# EAGLE board shield (EAGLE 8.7.1)
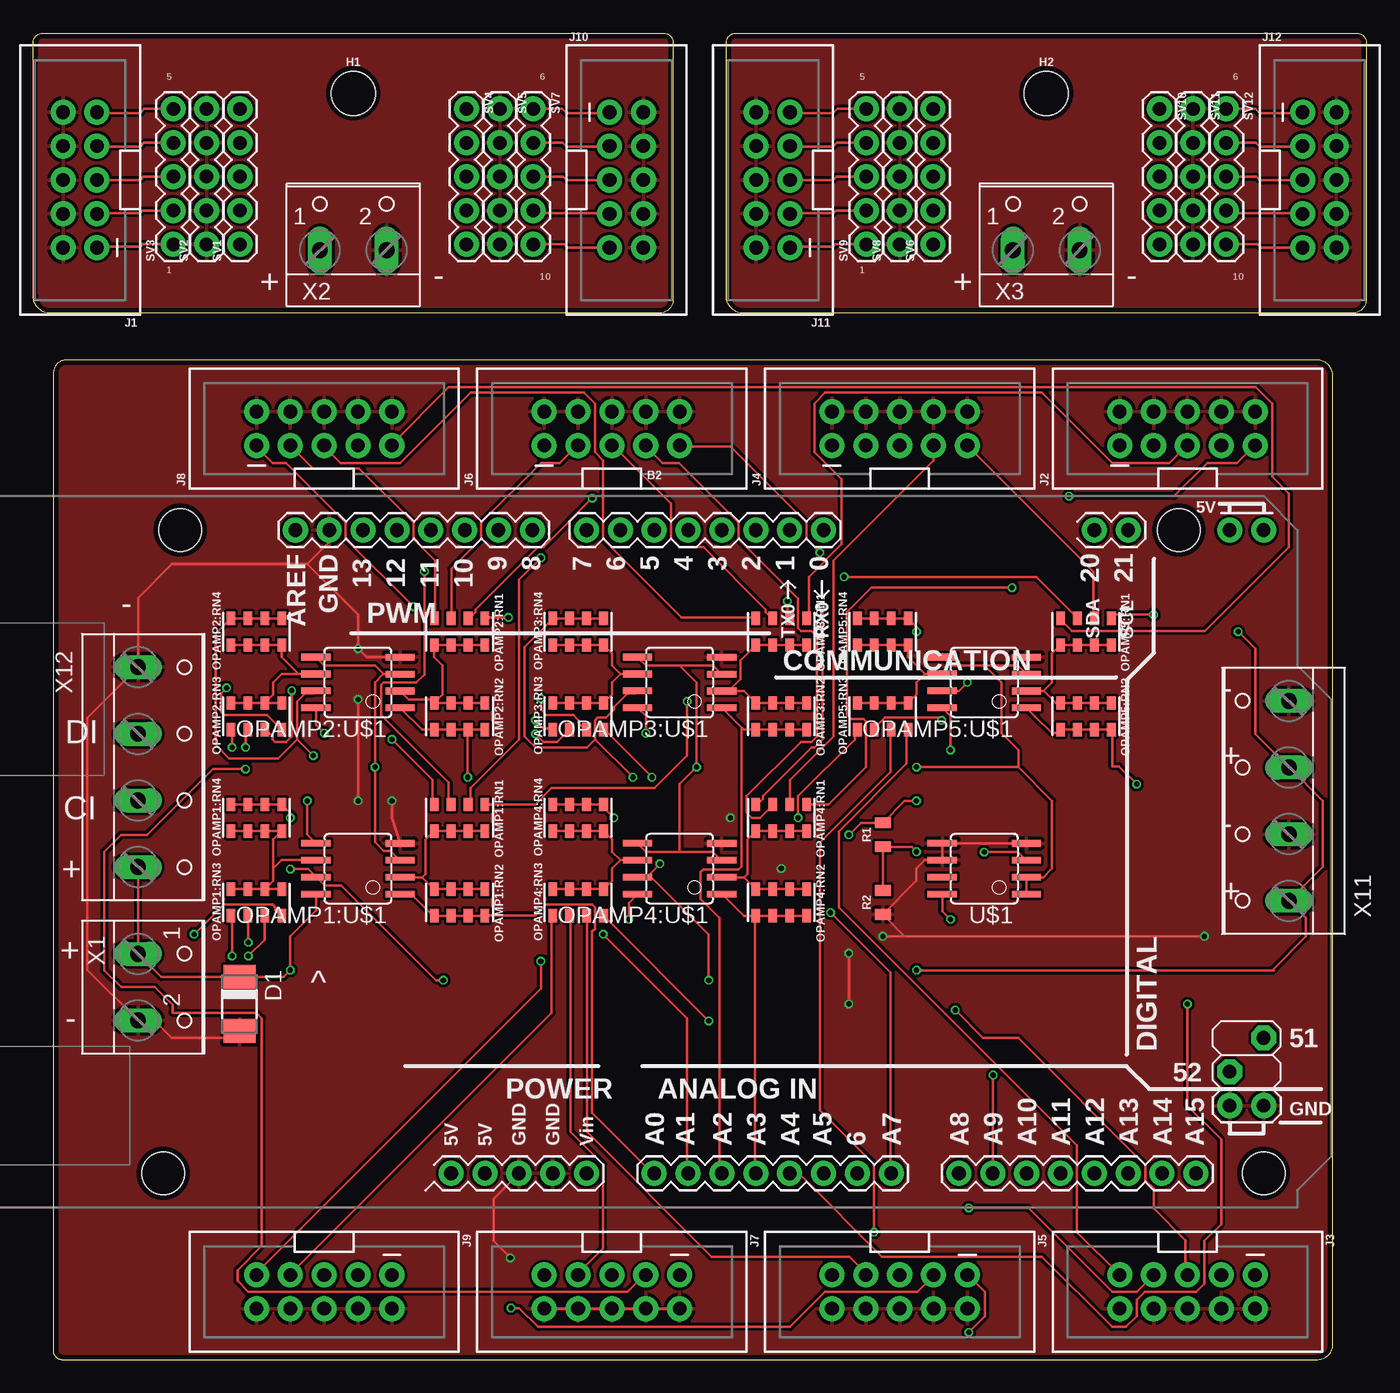
[diagram p0: board, top side]
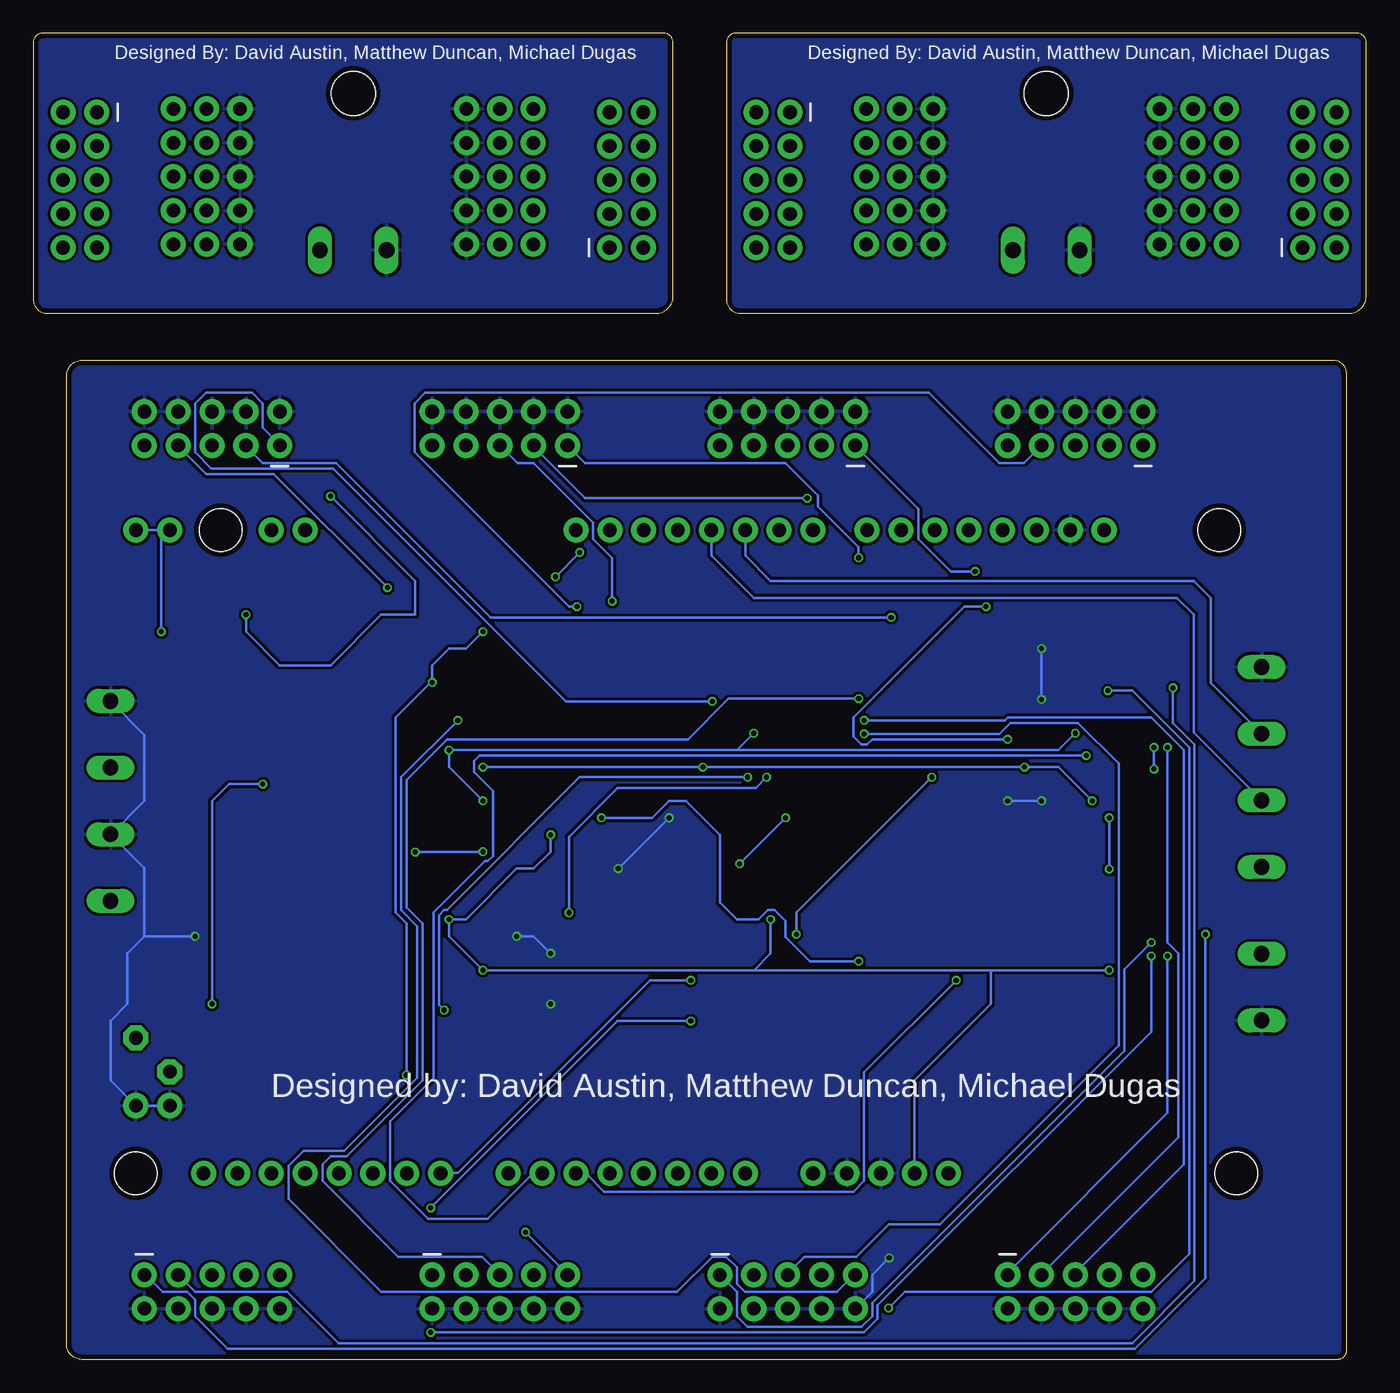
[diagram p1: board, bottom side, seen from below]

Size 100 x 99.5 mm. Coordinates in mm from the lower left corner, seen from the top.
Outline: 1.5,74 1.5,0.64 arc90 2.13,0 96.37,0 arc90 97.5,1.13 97.5,73.78 arc90 96.28,75 2.5,75 arc90 1.5,74
Outline: 0.68,99.5 47.32,99.5 arc-90 48,98.82 48,79.51 arc-90 46.99,78.5 1.27,78.5 arc-90 0,79.77 0,98.82 arc-90 0.68,99.5
Outline: 52.68,99.5 99.32,99.5 arc-90 100,98.82 100,79.51 arc-90 98.99,78.5 53.27,78.5 arc-90 52,79.77 52,98.82 arc-90 52.68,99.5
Copper layers (1*16): Top 0.035559375mm / dielectric 1.6mm / Bottom 0.035559375mm
Design rules "oshpark-2layer": minimum track width 6mil, minimum drill 10mil, track to track 6mil, track to pad 6mil, pad to pad 6mil, via to via 6mil, smd to smd 6mil, copper to edge 15mil, drill to drill 6mil, minimum pad ring 5mil, minimum via ring 5mil, stop-mask expansion 2.5mil, vias tented up to drill 0mil, thermal gap 10mil
Net classes: 0 default: width 0.203 mm, drill 0.381 mm, clearance 0.203 mm

## Footprints (pad centres in the part's own frame; a part is rotated, then mirrored left to right if it is on the bottom)
ARDUINO_MEGA_EDIT = drill 1.016 pad 1.88: 0 13.97,24.13; 1 11.43,24.13; 2 8.89,24.13; 3 6.35,24.13; 3.3V -13.97,-24.13; 4 3.81,24.13; 5 1.27,24.13; 5V@0 -11.43,-24.13; 5V@1 44.45,24.13; 5V@2 46.99,24.13; 6 -1.27,24.13; 7 -3.81,24.13; 8 -7.874,24.13; 9 -10.414,24.13; 10 -12.954,24.13; 11 -15.494,24.13; 12 -18.034,24.13; 13 -20.574,24.13; 20 34.29,24.13; 21 36.83,24.13; A0 1.27,-24.13; A1 3.81,-24.13; A2 6.35,-24.13; A3 8.89,-24.13; A4 11.43,-24.13; A5 13.97,-24.13; A6 16.51,-24.13; A7 19.05,-24.13; A8 24.13,-24.13; A9 26.67,-24.13; A10 29.21,-24.13; A11 31.75,-24.13; A12 34.29,-24.13; A13 36.83,-24.13; A14 39.37,-24.13; A15 41.91,-24.13; AREF -25.654,24.13; GND@0 -8.89,-24.13; GND@1 -6.35,-24.13; GND@2 44.45,-19.05; GND@3 46.99,-19.05; GND@4 -23.114,24.13; VIN -3.81,-24.13 | drill 1.016 pad 1.88 octagon: 51 46.99,-13.97; 52 44.45,-16.51 | hole 3.2: -34.29,24.13; -35.56,-24.13; 40.64,24.13; 46.99,-24.13
DO-214AC = smd 1.8 x 2.4: A 2.025,0; C -2.025,0
STAND-OFF = hole 3.302: 0,0
2X5-SHROUDED = drill 1.016 pad 1.88: 1 -1.27,5.08; 2 1.27,5.08; 3 -1.27,2.54; 4 1.27,2.54; 5 -1.27,0; 6 1.27,0; 7 -1.27,-2.54; 8 1.27,-2.54; 9 -1.27,-5.08; 10 1.27,-5.08
0805-ARV_EDIT10K = smd 0.65 x 1: 1 -1.905,-1; 2 -0.635,-1; 3 0.635,-1; 4 1.905,-1; 5 1.905,1; 6 0.635,1; 7 -0.635,1; 8 -1.905,1
SOIC8 = smd 0.5 x 2.2: 1 -1.905,-3.154; 2 -0.645,-3.154; 3 0.625,-3.154; 4 1.895,-3.154; 5 1.905,3.154; 6 0.635,3.154; 7 -0.635,3.154; 8 -1.905,3.154
0805 = smd 0.8 x 1.2: 1 -0.9,0; 2 0.9,0
1X05 = drill 1.016 pad 1.88: 1 0,0; 2 2.54,0; 3 5.08,0; 4 7.62,0; 5 10.16,0
W237-102 = drill 1.194 long: 1 -2.5,-1.27; 2 2.5,-1.27
W237-4 = drill 1.194 long: 1 -7.5,-1.27; 2 -2.5,-1.27; 3 2.5,-1.27; 4 7.5,-1.27

## Placement (x,y rotation side)
B2  ARDUINO_MEGA_R3_EDITARDUINO_MEGA_EDIT  [ARDUINO_MEGA_EDIT]  45.31,38.1 0 top
D1  [DO-214AC]  15.47,26.67 270 top
H1  STAND-OFF  [STAND-OFF]  24,95 0 top
H2  STAND-OFF  [STAND-OFF]  76,95 0 top
J1  AVR_SPI_PROG_5X2_NEWPTH2  [2X5-SHROUDED]  3.5,88.5 180 top
J2  AVR_SPI_PROG_5X2_NEWPTH2  [2X5-SHROUDED]  86.59,69.85 90 top
J3  AVR_SPI_PROG_5X2_NEWPTH2  [2X5-SHROUDED]  86.59,5.08 270 top
J4  AVR_SPI_PROG_5X2_NEWPTH2  [2X5-SHROUDED]  65,69.85 90 top
J5  AVR_SPI_PROG_5X2_NEWPTH2  [2X5-SHROUDED]  65,5.08 270 top
J6  AVR_SPI_PROG_5X2_NEWPTH2  [2X5-SHROUDED]  43.41,69.85 90 top
J7  AVR_SPI_PROG_5X2_NEWPTH2  [2X5-SHROUDED]  43.41,5.08 270 top
J8  AVR_SPI_PROG_5X2_NEWPTH2  [2X5-SHROUDED]  21.82,69.85 90 top
J9  AVR_SPI_PROG_5X2_NEWPTH2  [2X5-SHROUDED]  21.82,5.08 270 top
J10  AVR_SPI_PROG_5X2_NEWPTH2  [2X5-SHROUDED]  44.5,88.5 0 top
J11  AVR_SPI_PROG_5X2_NEWPTH2  [2X5-SHROUDED]  55.5,88.5 180 top
J12  AVR_SPI_PROG_5X2_NEWPTH2  [2X5-SHROUDED]  96.5,88.5 0 top
OPAMP1:RN1  10k  [0805-ARV_EDIT10K]  31.98,40.64 180 top
OPAMP1:RN2  10k  [0805-ARV_EDIT10K]  31.98,34.29 180 top
OPAMP1:RN3  10k  [0805-ARV_EDIT10K]  16.74,34.29 0 top
OPAMP1:RN4  10k  [0805-ARV_EDIT10K]  16.74,40.64 0 top
OPAMP1:U$1  MCP6002SMT  [SOIC8]  24.36,36.83 90 top
OPAMP2:RN1  10k  [0805-ARV_EDIT10K]  31.98,54.61 180 top
OPAMP2:RN2  10k  [0805-ARV_EDIT10K]  31.98,48.26 180 top
OPAMP2:RN3  10k  [0805-ARV_EDIT10K]  16.74,48.26 0 top
OPAMP2:RN4  10k  [0805-ARV_EDIT10K]  16.74,54.61 0 top
OPAMP2:U$1  MCP6002SMT  [SOIC8]  24.36,50.8 90 top
OPAMP3:RN1  10k  [0805-ARV_EDIT10K]  56.11,54.61 180 top
OPAMP3:RN2  10k  [0805-ARV_EDIT10K]  56.11,48.26 180 top
OPAMP3:RN3  10k  [0805-ARV_EDIT10K]  40.87,48.26 0 top
OPAMP3:RN4  10k  [0805-ARV_EDIT10K]  40.87,54.61 0 top
OPAMP3:U$1  MCP6002SMT  [SOIC8]  48.49,50.8 90 top
OPAMP4:RN1  10k  [0805-ARV_EDIT10K]  56.11,40.64 180 top
OPAMP4:RN2  10k  [0805-ARV_EDIT10K]  56.11,34.29 180 top
OPAMP4:RN3  10k  [0805-ARV_EDIT10K]  40.87,34.29 0 top
OPAMP4:RN4  10k  [0805-ARV_EDIT10K]  40.87,40.64 0 top
OPAMP4:U$1  MCP6002SMT  [SOIC8]  48.49,36.83 90 top
OPAMP5:RN1  10k  [0805-ARV_EDIT10K]  78.97,54.61 180 top
OPAMP5:RN2  10k  [0805-ARV_EDIT10K]  78.97,48.26 180 top
OPAMP5:RN3  10k  [0805-ARV_EDIT10K]  63.73,48.26 0 top
OPAMP5:RN4  10k  [0805-ARV_EDIT10K]  63.73,54.61 0 top
OPAMP5:U$1  MCP6002SMT  [SOIC8]  71.35,50.8 90 top
R1  1k  [0805]  63.73,39.37 90 top
R2  1k  [0805]  63.73,34.29 90 top
SV1  [1X05]  15.5,83.67 90 top
SV2  [1X05]  13,83.67 90 top
SV3  [1X05]  10.5,83.67 90 top
SV4  [1X05]  32.5,93.83 270 top
SV5  [1X05]  35,93.83 270 top
SV6  [1X05]  67.5,83.67 90 top
SV7  [1X05]  37.5,93.83 270 top
SV8  [1X05]  65,83.67 90 top
SV9  [1X05]  62.5,83.67 90 top
SV10  [1X05]  84.5,93.83 270 top
SV11  [1X05]  87,93.83 270 top
SV12  [1X05]  89.5,93.83 270 top
U$1  MCP6002SMT  [SOIC8]  71.35,36.83 90 top
X1  [W237-102]  9.12,27.94 270 top
X2  [W237-102]  24,84.5 0 top
X3  [W237-102]  76,84.5 0 top
X11  [W237-4]  92.94,41.91 90 top
X12  [W237-4]  9.12,44.45 270 top

## Library data of the parts
B2 = SparkFun-Boards
D1 = diode
H1 H2 = SparkFun-Hardware
J1-J12 = SparkFun-Connectors; PROD_ID: CONN-08671; SF_ID: PRT-08506
OPAMP1:RN1-OPAMP1:RN4 OPAMP2:RN1-OPAMP2:RN4 OPAMP3:RN1-OPAMP3:RN4 OPAMP4:RN1-OPAMP4:RN4 OPAMP5:RN1-OPAMP5:RN4 R1 R2 = SparkFun-Resistors
OPAMP1:U$1 OPAMP2:U$1 OPAMP3:U$1 OPAMP4:U$1 OPAMP5:U$1 U$1 = adam - ics
SV1-SV12 = SparkFun-Connectors
X1 = con-wago-500; MPN: 237-102; OC_FARNELL: unknown; OC_NEWARK: 70K9898
X2 X3 = ECE388; MPN: 237-102; OC_FARNELL: unknown; OC_NEWARK: 70K9898
X11 X12 = con-wago-500; OC_FARNELL: unknown; OC_NEWARK: unknown

## Nets
+5V: B2.5V@0 B2.5V@1 B2.5V@2 D1.C OPAMP1:U$1.8 OPAMP2:U$1.8 OPAMP3:U$1.8 OPAMP4:U$1.8 OPAMP5:U$1.8 R1.2 U$1.8 X1.1 X11.1 X11.3 X12.4
A1O: B2.A0 OPAMP1:RN2.5 OPAMP1:RN2.6 OPAMP1:RN2.7 OPAMP1:RN2.8 OPAMP1:U$1.1
A2O: B2.A1 OPAMP2:RN2.5 OPAMP2:RN2.6 OPAMP2:RN2.7 OPAMP2:RN2.8 OPAMP2:U$1.1
A3O: B2.A2 OPAMP3:RN2.5 OPAMP3:RN2.6 OPAMP3:RN2.7 OPAMP3:RN2.8 OPAMP3:U$1.1
A4O: B2.A3 OPAMP4:RN2.5 OPAMP4:RN2.6 OPAMP4:RN2.7 OPAMP4:RN2.8 OPAMP4:U$1.1
A5O: B2.A4 OPAMP5:RN2.5 OPAMP5:RN2.6 OPAMP5:RN2.7 OPAMP5:RN2.8 OPAMP5:U$1.1
A6O: B2.A5 OPAMP1:RN4.5 OPAMP1:RN4.6 OPAMP1:RN4.7 OPAMP1:RN4.8 OPAMP1:U$1.7
A7O: B2.A6 OPAMP2:RN4.5 OPAMP2:RN4.6 OPAMP2:RN4.7 OPAMP2:RN4.8 OPAMP2:U$1.7
A8O: B2.A7 OPAMP3:RN4.5 OPAMP3:RN4.6 OPAMP3:RN4.7 OPAMP3:RN4.8 OPAMP3:U$1.7
A9O: B2.A8 OPAMP4:RN4.5 OPAMP4:RN4.6 OPAMP4:RN4.7 OPAMP4:RN4.8 OPAMP4:U$1.7
A10O: B2.A9 OPAMP5:RN4.5 OPAMP5:RN4.6 OPAMP5:RN4.7 OPAMP5:RN4.8 OPAMP5:U$1.7
CI: B2.4 X12.3
DI: B2.5 X12.2
GND: B2.GND@0 B2.GND@1 B2.GND@2 B2.GND@3 B2.GND@4 D1.A J2.2 J2.4 J2.6 J2.8 J2.10 J3.2 J3.4 J3.6 J3.8 J3.10 J4.2 J4.4 J4.6 J4.8 J4.10 J5.2 J5.4 J5.6 J5.8 J5.10 J6.2 J6.4 J6.6 J6.8 J6.10 J7.2 J7.4 J7.6 J7.8 J7.10 J8.2 J8.4 J8.6 J8.8 J8.10 J9.2 J9.4 J9.6 J9.8 J9.10 OPAMP1:U$1.4 OPAMP2:U$1.4 OPAMP3:U$1.4 OPAMP4:U$1.4 OPAMP5:U$1.4 R2.1 U$1.4 U$1.5 U$1.6 X1.2 X11.2 X11.4 X12.1
GND1: J1.2 J1.4 J1.6 J1.8 J1.10 J10.2 J10.4 J10.6 J10.8 J10.10 SV2.1 SV2.2 SV2.3 SV2.4 SV2.5 SV5.1 SV5.2 SV5.3 SV5.4 SV5.5 X2.2
GND2: J11.2 J11.4 J11.6 J11.8 J11.10 J12.2 J12.4 J12.6 J12.8 J12.10 SV8.1 SV8.2 SV8.3 SV8.4 SV8.5 SV11.1 SV11.2 SV11.3 SV11.4 SV11.5 X3.2
N$1: U$1.7
N$2: R1.1 R2.2 U$1.3
OPAMP1:N$1: OPAMP1:RN3.5 OPAMP1:RN3.6 OPAMP1:RN3.7 OPAMP1:RN3.8 OPAMP1:RN4.1 OPAMP1:RN4.2 OPAMP1:RN4.3 OPAMP1:RN4.4 OPAMP1:U$1.6
OPAMP1:N$2: OPAMP1:RN1.5 OPAMP1:RN1.6 OPAMP1:RN1.7 OPAMP1:RN1.8 OPAMP1:RN2.1 OPAMP1:RN2.2 OPAMP1:RN2.3 OPAMP1:RN2.4 OPAMP1:U$1.2
OPAMP2:N$1: OPAMP2:RN3.5 OPAMP2:RN3.6 OPAMP2:RN3.7 OPAMP2:RN3.8 OPAMP2:RN4.1 OPAMP2:RN4.2 OPAMP2:RN4.3 OPAMP2:RN4.4 OPAMP2:U$1.6
OPAMP2:N$2: OPAMP2:RN1.5 OPAMP2:RN1.6 OPAMP2:RN1.7 OPAMP2:RN1.8 OPAMP2:RN2.1 OPAMP2:RN2.2 OPAMP2:RN2.3 OPAMP2:RN2.4 OPAMP2:U$1.2
OPAMP3:N$1: OPAMP3:RN3.5 OPAMP3:RN3.6 OPAMP3:RN3.7 OPAMP3:RN3.8 OPAMP3:RN4.1 OPAMP3:RN4.2 OPAMP3:RN4.3 OPAMP3:RN4.4 OPAMP3:U$1.6
OPAMP3:N$2: OPAMP3:RN1.5 OPAMP3:RN1.6 OPAMP3:RN1.7 OPAMP3:RN1.8 OPAMP3:RN2.1 OPAMP3:RN2.2 OPAMP3:RN2.3 OPAMP3:RN2.4 OPAMP3:U$1.2
OPAMP4:N$1: OPAMP4:RN3.5 OPAMP4:RN3.6 OPAMP4:RN3.7 OPAMP4:RN3.8 OPAMP4:RN4.1 OPAMP4:RN4.2 OPAMP4:RN4.3 OPAMP4:RN4.4 OPAMP4:U$1.6
OPAMP4:N$2: OPAMP4:RN1.5 OPAMP4:RN1.6 OPAMP4:RN1.7 OPAMP4:RN1.8 OPAMP4:RN2.1 OPAMP4:RN2.2 OPAMP4:RN2.3 OPAMP4:RN2.4 OPAMP4:U$1.2
OPAMP5:N$1: OPAMP5:RN3.5 OPAMP5:RN3.6 OPAMP5:RN3.7 OPAMP5:RN3.8 OPAMP5:RN4.1 OPAMP5:RN4.2 OPAMP5:RN4.3 OPAMP5:RN4.4 OPAMP5:U$1.6
OPAMP5:N$2: OPAMP5:RN1.5 OPAMP5:RN1.6 OPAMP5:RN1.7 OPAMP5:RN1.8 OPAMP5:RN2.1 OPAMP5:RN2.2 OPAMP5:RN2.3 OPAMP5:RN2.4 OPAMP5:U$1.2
S1: J1.1 SV3.1
S1A: J2.1 OPAMP1:RN1.1
S1B: J3.1 OPAMP1:RN3.4
S2: J1.3 SV3.2
S2A: J2.3 OPAMP2:RN1.1
S2B: J3.3 OPAMP2:RN3.4
S3: J1.5 SV3.3
S3A: J2.5 OPAMP3:RN1.1
S3B: J3.5 OPAMP3:RN3.4
S4: J1.7 SV3.4
S4A: J2.7 OPAMP4:RN1.1
S4B: J3.7 OPAMP4:RN3.4
S5: J1.9 SV3.5
S5A: J2.9 OPAMP5:RN1.1
S5B: J3.9 OPAMP5:RN3.4
S6: J10.1 SV7.1
S6A: J4.1 OPAMP1:RN1.2
S6B: J5.1 OPAMP1:RN3.3
S7: J10.3 SV7.2
S7A: J4.3 OPAMP2:RN1.2
S7B: J5.3 OPAMP2:RN3.3
S8: J10.5 SV7.3
S8A: J4.5 OPAMP3:RN1.2
S8B: J5.5 OPAMP3:RN3.3
S9: J10.7 SV7.4
S9A: J4.7 OPAMP4:RN1.2
S9B: J5.7 OPAMP4:RN3.3
S10: J10.9 SV7.5
S10A: J4.9 OPAMP5:RN1.2
S10B: J5.9 OPAMP5:RN3.3
S11: J11.1 SV9.1
S11A: J6.1 OPAMP1:RN1.3
S11B: J7.1 OPAMP1:RN3.2
S12: J11.3 SV9.2
S12A: J6.3 OPAMP2:RN1.3
S12B: J7.3 OPAMP2:RN3.2
S13: J11.5 SV9.3
S13A: J6.5 OPAMP3:RN1.3
S13B: J7.5 OPAMP3:RN3.2
S14: J11.7 SV9.4
S14A: J6.7 OPAMP4:RN1.3
S14B: J7.7 OPAMP4:RN3.2
S15: J11.9 SV9.5
S15A: J6.9 OPAMP5:RN1.3
S15B: J7.9 OPAMP5:RN3.2
S16: J12.1 SV12.1
S16A: J8.1 OPAMP1:RN1.4
S16B: J9.1 OPAMP1:RN3.1
S17: J12.3 SV12.2
S17A: J8.3 OPAMP2:RN1.4
S17B: J9.3 OPAMP2:RN3.1
S18: J12.5 SV12.3
S18A: J8.5 OPAMP3:RN1.4
S18B: J9.5 OPAMP3:RN3.1
S19: J12.7 SV12.4
S19A: J8.7 OPAMP4:RN1.4
S19B: J9.7 OPAMP4:RN3.1
S20: J12.9 SV12.5
S20A: J8.9 OPAMP5:RN1.4
S20B: J9.9 OPAMP5:RN3.1
VCC: SV1.1 SV1.2 SV1.3 SV1.4 SV1.5 SV4.1 SV4.2 SV4.3 SV4.4 SV4.5 X2.1
VCC1: SV6.1 SV6.2 SV6.3 SV6.4 SV6.5 SV10.1 SV10.2 SV10.3 SV10.4 SV10.5 X3.1
VREF: OPAMP1:U$1.3 OPAMP1:U$1.5 OPAMP2:U$1.3 OPAMP2:U$1.5 OPAMP3:U$1.3 OPAMP3:U$1.5 OPAMP4:U$1.3 OPAMP4:U$1.5 OPAMP5:U$1.3 OPAMP5:U$1.5 U$1.1 U$1.2

## Tracks (layer width: path | path; a pad name or v marks a point on that pad's centre or on a via)
+5V  (via drill 0.38)
  Top 0.203: X12.4 X1.1 9.59,28.7 D1.C 18.77,28.7 v19.28,29.21 19.28,31.75 21.21,33.68 OPAMP1:U$1.8 | v68.81,33.02 68.2,33.63 U$1.8 | v61.19,39.37 62.09,40.27 R1.2 65.37,41.91 v66.27,41.91 | OPAMP2:U$1.8 21.21,47.6 v21.82,46.99 | v68.81,45.72 68.81,48.28 OPAMP5:U$1.8 | OPAMP3:U$1.8 45.95,48.28 v45.95,46.99 | v44.68,33.02 44.68,34.27 OPAMP4:U$1.8 | v66.27,29.21 92.94,29.21 | 92.94,29.21 93.06,29.21 | 92.94,29.21 95.48,31.75 95.48,33.14 X11.1 96.75,36.95 96.75,41.91 94.25,44.41 X11.3 91.67,46.95 91.67,53.34 v90.4,54.61
  Bottom 0.203: v19.28,29.21 28.17,29.21 | 28.17,29.21 45.95,29.21 | 45.95,29.21 v66.27,29.21 68.81,31.75 v68.81,33.02 67.54,33.02 63.73,36.83 62.46,36.83 61.19,38.1 v61.19,39.37 | v66.27,41.91 68.81,44.45 v68.81,45.72 47.22,45.72 | 47.22,45.72 23.09,45.72 v21.82,46.99 | v45.95,46.99 47.22,45.72 | 45.95,29.21 44.68,30.48 v44.68,33.02 | B2.5V@0 33.89,20.95 28.17,26.67 28.17,29.21 | v90.4,54.61 90.4,61.59 B2.5V@1 B2.5V@2
A1O
  Top 0.203: B2.A0 46.41,14.02 41.94,18.49 41.94,32.11 42.14,32.31 42.14,33.93 41.94,34.14 38.48,34.14 37.67,33.33 34.01,33.33 OPAMP1:RN2.8 OPAMP1:RN2.7 OPAMP1:RN2.6 OPAMP1:RN2.5 29.95,33.33 28.35,34.92 OPAMP1:U$1.1
A2O  (via drill 0.38)
  Top 0.203: OPAMP2:RN2.7 OPAMP2:RN2.6 OPAMP2:RN2.5 29.17,47.26 27.54,48.9 OPAMP2:U$1.1 | OPAMP2:RN2.7 OPAMP2:RN2.8 | v42.75,31.9 49.05,25.6 49.05,14.02 B2.A1 | v32.59,43.69 32.59,47.14 OPAMP2:RN2.7
  Bottom 0.203: v42.75,31.9 42.75,33.53 v32.59,43.69
A3O
  Top 0.203: OPAMP3:RN2.8 OPAMP3:RN2.7 OPAMP3:RN2.6 OPAMP3:RN2.5 53.3,47.26 53.16,47.4 | OPAMP3:U$1.1 51.66,48.9 53.16,47.4 | B2.A2 51.49,14.02 51.49,33.12 50.06,34.54 50.06,36.58 50.27,36.78 52.91,36.78 53.11,36.98 53.11,47.35 53.16,47.4
A4O
  Top 0.203: OPAMP4:RN2.8 OPAMP4:RN2.7 OPAMP4:RN2.6 OPAMP4:RN2.5 | OPAMP4:RN2.5 53.3,33.29 51.66,34.92 OPAMP4:U$1.1 | B2.A3 54.13,14.02 54.13,33.12 OPAMP4:RN2.5
A5O  (via drill 0.38)
  Top 0.203: OPAMP5:U$1.1 75.14,48.26 75.16,48.26 76.43,46.99 76.8,46.99 OPAMP5:RN2.5 OPAMP5:RN2.6 OPAMP5:RN2.7 OPAMP5:RN2.8 80.95,47.14 80.95,44.5 81.46,44.5 v82.78,43.18 | B2.A4 56.77,13.82 57.58,13.82 63.68,7.72 75.67,7.72 80.95,2.44 81.97,2.44 82.78,3.25 82.78,4.47 83.39,5.08 87.25,5.08 87.86,5.69 87.86,8.89 89.13,10.16 89.13,16.51 86.59,19.05 v86.59,26.67
  Bottom 0.203: v86.59,26.67 86.59,41.91 85.32,43.18 v82.78,43.18
A6O  (via drill 0.38)
  Top 0.203: OPAMP1:RN4.8 OPAMP1:RN4.7 OPAMP1:RN4.6 OPAMP1:RN4.5 19.28,41.01 v19.28,40.64 | v30.76,28.45 30.2,28.45 23.09,35.56 21.84,35.56 OPAMP1:U$1.7 20.61,36.79 v19.28,36.79
  Bottom 0.203: v30.76,28.45 37.67,21.54 37.67,13.41 38.48,12.6 57.18,12.6 58.4,13.82 59.21,13.82 B2.A5 | v19.28,36.79 v19.28,40.64
A7O  (via drill 0.38)
  Top 0.203: OPAMP2:RN4.5 OPAMP2:RN4.6 OPAMP2:RN4.7 OPAMP2:RN4.8 14.71,55.47 13.69,54.46 13.69,46.13 14.71,45.11 18.37,45.11 19.79,46.53 | 19.79,46.53 19.79,49.38 20.4,49.99 21.01,49.99 OPAMP2:U$1.7 | 19.79,46.53 v21.01,45.31
  Bottom 0.203: v21.01,45.31 66.52,45.31 66.93,44.91 66.93,44.09 65.51,42.67 65.51,37.8 65.91,37.39 66.12,37.39 69.98,33.53 69.98,21.13 73.23,17.88 73.23,13.41 70.39,10.57 65.91,10.57 62.66,13.82 61.85,13.82 B2.A6
A8O  (via drill 0.38)
  Top 0.203: OPAMP3:RN4.5 OPAMP3:RN4.6 OPAMP3:RN4.7 OPAMP3:RN4.8 38.89,55.47 36.86,53.44 36.86,46.74 37.67,45.92 41.53,45.92 42.14,46.53 | 42.14,46.53 42.14,47.95 42.34,48.16 42.95,48.16 43.56,48.77 43.56,48.97 44.58,49.99 45.19,49.99 OPAMP3:U$1.7 | v59.82,33.53 64.29,29.06 64.29,14.02 B2.A7 | 42.14,46.53 v44.98,43.69
  Bottom 0.203: v59.82,33.53 59.82,39.22 56.16,42.88 45.8,42.88 v44.98,43.69
A9O  (via drill 0.38)
  Top 0.203: OPAMP4:RN4.8 OPAMP4:RN4.7 OPAMP4:RN4.6 OPAMP4:RN4.5 42.75,41.45 v43.56,40.64 | 46.2,36.37 45.39,36.37 OPAMP4:U$1.7 46.2,36.37 | v47.02,37.19 46.2,36.37 | v50.67,28.45 50.67,31.9 46.2,36.37
  Bottom 0.203: v43.56,40.64 v47.02,37.19 | v50.67,28.45 53.72,28.45 68.15,14.02 69.37,14.02 B2.A8
A10O  (via drill 0.38)
  Top 0.203: OPAMP5:RN4.8 OPAMP5:RN4.7 OPAMP5:RN4.6 OPAMP5:RN4.5 66.27,54.98 v66.27,54.61 | v70.08,50.8 69.44,50.16 OPAMP5:U$1.7 | v72.01,21.34 72.01,14.02 B2.A9
  Bottom 0.203: v66.27,54.61 67.54,53.34 68.81,53.34 70.08,52.07 v70.08,50.8 70.18,50.8 72.82,48.16 72.82,33.53 72.01,32.72 v72.01,21.34
CI
  Bottom 0.203: X12.3 12.93,47.03 12.93,55.88 14.2,57.15 45.95,57.15 49.12,60.33 B2.4
DI
  Bottom 0.203: X12.2 11.66,50.76 11.66,57.15 12.93,58.42 44.68,58.42 46.59,60.33 B2.5
GND  (via drill 0.38)
  Top 0.203: D1.A 14.96,24.13 10.39,24.13 9.08,25.44 X1.2 4.04,29.25 4.04,48.14 X12.1 7.85,57.15 10.39,59.69 20.55,59.69 | B2.GND@4 22.2,61.34 20.55,59.69 | U$1.4 U$1.5 U$1.6 66.91,37.47 66.27,36.83 66.27,35.93 R2.1 65.37,31.75 | B2.GND@0 34.52,12.06 34.52,8.89 v35.79,7.62 | J7.2 J7.4 J7.6 J7.8 J7.10 | v61.19,26.67 v61.19,30.48 | v63.73,31.75 65.37,31.75 | OPAMP2:U$1.4 25,52.7 v24.36,53.34 24.36,55.88 20.55,59.69 | v24.36,49.53 v24.36,41.91 | v26.9,41.91 26.9,40.61 OPAMP1:U$1.4 | 65.37,31.75 v87.86,31.75
  Bottom 0.203: B2.GND@3 B2.GND@2 | B2.GND@3 91.67,19.68 | v35.79,7.62 37.06,6.35 37.06,5.08 J7.10 | v61.19,30.48 62.46,31.75 v63.73,31.75 | v24.36,53.34 v24.36,49.53 | v24.36,41.91 v26.9,41.91 | v56.11,36.83 v52.3,40.64 | B2.GND@3 94.21,20.95 94.21,25.4 92.94,26.67 92.94,30.48 91.67,31.75 | v87.86,31.75 91.67,31.75 | 91.67,31.75 91.67,36.87 X11.2 94.17,39.41 91.67,41.91 91.67,46.87 X11.4
  pour Top: 1.5,0.5 1.5,74 arc-90 2.5,75 96.5,75 arc-90 97.5,74 97.5,1 arc-90 96.5,0 2,0 arc-90
  pour Bottom: 1.5,74 arc-90 2.5,75 96.5,75 arc-90 97.5,74 97.5,1 arc-90 96.5,0 2,0 arc-90 1.5,0.5
GND1
  pour Top: 0,99.5 48,99.5 48.26,78.5 0,78.5
GND2
  pour Top: 52,99.5 100,99.5 100.26,78.5 52,78.5
N$2  (via drill 0.38)
  Top 0.203: v66.27,38.1 65.9,38.47 R1.1 R2.2 | v71.35,38.08 73.88,38.08 U$1.3
  Bottom 0.203: v66.27,38.1 71.35,38.1 v71.35,38.08
OPAMP1:N$1
  Top 0.203: OPAMP1:RN4.1 OPAMP1:RN4.2 OPAMP1:RN4.3 OPAMP1:RN4.4 18.01,39.01 18.01,36.83 | OPAMP1:RN3.8 OPAMP1:RN3.7 OPAMP1:RN3.6 | OPAMP1:RN3.6 OPAMP1:RN3.5 | OPAMP1:RN3.6 18.01,35.92 18.01,36.83 | 18.01,36.83 18.64,37.47 OPAMP1:U$1.6
OPAMP1:N$2
  Top 0.203: OPAMP1:RN2.1 OPAMP1:RN2.2 OPAMP1:RN2.3 OPAMP1:RN2.4 29.18,36.19 | OPAMP1:RN1.8 OPAMP1:RN1.7 OPAMP1:RN1.6 OPAMP1:RN1.5 29.44,39.01 29.44,36.45 29.18,36.19 | OPAMP1:U$1.2 29.18,36.19
OPAMP2:N$1
  Top 0.203: OPAMP2:RN3.5 OPAMP2:RN3.6 | OPAMP2:RN3.6 OPAMP2:RN3.7 OPAMP2:RN3.8 | OPAMP2:RN4.1 OPAMP2:RN4.2 OPAMP2:RN4.3 OPAMP2:RN4.4 18.64,52.7 19.91,51.44 | OPAMP2:U$1.6 19.91,51.44 | OPAMP2:RN3.6 18.01,49.9 18.01,50.8 18.64,51.44 19.91,51.44
OPAMP2:N$2
  Top 0.203: OPAMP2:RN2.1 OPAMP2:RN2.2 OPAMP2:RN2.3 OPAMP2:RN2.4 | OPAMP2:RN2.4 29.8,49.53 28.14,49.53 OPAMP2:U$1.2 | OPAMP2:RN2.4 30.71,49.9 30.71,52.07 30.07,52.7 OPAMP2:RN1.5 OPAMP2:RN1.6 OPAMP2:RN1.7 OPAMP2:RN1.8
OPAMP3:N$1
  Top 0.203: OPAMP3:RN3.8 OPAMP3:RN3.7 OPAMP3:RN3.6 OPAMP3:RN3.5 43.41,49.9 43.41,50.8 44.05,51.44 | OPAMP3:RN4.1 OPAMP3:RN4.2 OPAMP3:RN4.3 OPAMP3:RN4.4 43.41,52.98 43.41,52.07 44.05,51.44 | 44.05,51.44 OPAMP3:U$1.6
OPAMP3:N$2
  Top 0.203: OPAMP3:RN1.8 OPAMP3:RN1.7 OPAMP3:RN1.6 OPAMP3:RN1.5 53.05,52.45 53.05,51.05 52.3,50.3 52.3,50.16 | OPAMP3:RN2.1 OPAMP3:RN2.2 OPAMP3:RN2.3 OPAMP3:RN2.4 53.31,50.16 52.3,50.16 | 52.3,50.16 OPAMP3:U$1.2
OPAMP4:N$1
  Top 0.203: OPAMP4:RN3.8 OPAMP4:RN3.7 OPAMP4:RN3.6 OPAMP4:RN3.5 43.41,35.92 43.41,36.83 44.05,37.47 | 44.05,37.47 OPAMP4:U$1.6 | OPAMP4:RN4.1 OPAMP4:RN4.2 OPAMP4:RN4.3 OPAMP4:RN4.4 43.41,39.01 43.41,38.1 44.05,37.47
OPAMP4:N$2
  Top 0.203: OPAMP4:RN2.1 OPAMP4:RN2.2 OPAMP4:RN2.3 OPAMP4:RN2.4 53.31,36.19 | 53.31,36.19 OPAMP4:U$1.2 | OPAMP4:RN1.8 OPAMP4:RN1.7 OPAMP4:RN1.6 OPAMP4:RN1.5 53.57,39.01 53.57,36.45 53.31,36.19
OPAMP5:N$1
  Top 0.203: OPAMP5:RN4.1 OPAMP5:RN4.2 OPAMP5:RN4.3 OPAMP5:RN4.4 65.63,52.7 66.91,51.44 | OPAMP5:RN3.8 OPAMP5:RN3.7 OPAMP5:RN3.6 OPAMP5:RN3.5 66.27,49.9 66.27,50.8 66.91,51.44 | 66.91,51.44 OPAMP5:U$1.6
OPAMP5:N$2
  Top 0.203: OPAMP5:RN2.1 OPAMP5:RN2.2 OPAMP5:RN2.3 OPAMP5:RN2.4 76.7,49.26 75.81,50.16 75.78,50.16 | 75.78,50.16 OPAMP5:U$1.2 | OPAMP5:RN1.8 OPAMP5:RN1.7 OPAMP5:RN1.6 OPAMP5:RN1.5 76.43,52.98 76.43,50.8 75.78,50.16
S1
  Top 0.203: J1.1 4.85,83.5 8,83.5 8.17,83.67 SV3.1
S1A  (via drill 0.38)
  Top 0.203: v49.05,49.38 49.05,45.31 46.61,42.88 38.89,42.88 37.67,41.66 34.01,41.66 OPAMP1:RN1.1
  Bottom 0.203: v49.05,49.38 60.02,49.38 77.5,66.85 86.64,66.85 87.86,68.07 87.86,71.73 87.05,72.54 83.59,72.54 82.78,71.73 82.78,69.9 81.56,68.68 J2.1
S1B  (via drill 0.38)
  Top 0.203: v12.07,31.9 14.3,34.14 17.96,34.14 18.16,33.93 18.16,33.73 18.57,33.33 OPAMP1:RN3.4
  Bottom 0.203: v12.07,31.9 12.07,6.1 17.35,0.81 85.42,0.81 87.86,3.25 87.86,4.47 88.47,5.08 90.3,5.08 91.52,6.3 J3.1
S2
  Top 0.203: J1.3 4.85,86.04 4.89,86 8,86 8.21,86.21 SV3.2
S2A  (via drill 0.38)
  Top 0.203: v35.64,55.68 34.01,55.68 OPAMP2:RN1.1
  Bottom 0.203: v35.64,55.68 65.71,55.68 77.29,67.26 82.78,67.26 84,68.48 J2.3
S2B  (via drill 0.38)
  Top 0.203: v14.51,50.39 14.1,49.99 14.1,48.56 14.3,48.36 17.55,48.36 18.57,47.35 OPAMP2:RN3.4
  Bottom 0.203: v14.51,50.39 14.51,47.75 12.88,46.13 12.88,5.89 17.55,1.22 77.09,1.22 80.95,5.08 87.86,5.08 J3.3
S3
  Top 0.203: 4.85,88.58 J1.5 8,88.5 8.25,88.75 SV3.3
S3A
  Top 0.203: OPAMP3:RN1.1 58.19,55.68 58.19,58.73 60.63,61.16 60.63,66.04 58.6,68.07 58.6,71.73 59.41,72.54 75.67,72.54 80.95,67.26 85.22,67.26 86.44,68.48 J2.5
S3B  (via drill 0.38)
  Top 0.203: v46.41,43.69 42.95,47.14 OPAMP3:RN3.4 | J3.5 86.44,6.5 86.44,8.94 84.05,11.33 84.05,12.85 83.44,13.45 83.44,14.58 73.89,24.13 71.25,24.13 v69.17,26.21
  Bottom 0.203: v46.41,43.69 59.01,43.69 68.96,33.73 69.17,33.73 69.57,33.33 69.57,26.62 v69.17,26.21
S4
  Top 0.203: J1.7 4.85,91.12 4.97,91 8,91 8.29,91.29 SV3.4
S4A  (via drill 0.38)
  Top 0.203: v73.43,57.91 62.87,57.91 61.04,56.08 61.04,48.41 61.38,48.06 62.28,48.06 62.46,47.88 62.46,44.45 59.65,41.64 OPAMP4:RN1.1 58.19,41.66
  Bottom 0.203: v73.43,57.91 81.97,66.45 87.05,66.45 89.08,68.48 J2.7
S4B  (via drill 0.38)
  Top 0.203: v50.67,25.4 42.95,33.12 OPAMP4:RN3.4 | v70.18,11.38 74.65,11.38 80.95,5.08 82.78,5.08 J3.7
  Bottom 0.203: v50.67,25.4 56.16,25.4 v70.18,11.38
S5
  Top 0.203: 9.92,93.58 SV3.5 8.33,93.83 8,93.5 4.85,93.5 J1.9
S5A  (via drill 0.38)
  Top 0.203: OPAMP5:RN1.1 80.95,55.68 81.15,55.88 v84.05,55.88 | J2.9 91.52,68.48 90.3,67.26 88.06,67.26 85.57,64.77 v77.7,64.77
  Bottom 0.203: v84.05,55.88 84.05,54.61 81.51,52.07 77.7,52.07 73.89,55.88 71.35,55.88 71.35,58.42 v77.7,64.77
S5B
  Top 0.203: J3.9 78.31,9.55 78.31,16.05 60.43,33.93 60.43,39.62 65.51,44.7 65.51,47.14 OPAMP5:RN3.4
S6
  Top 0.203: SV7.1 39.67,93.83 40,93.5 43.15,93.5 J10.1
S6A  (via drill 0.38)
  Top 0.203: v38.08,60.15 36.45,58.52 36.45,46.53 32.79,42.88 32.79,41.66 OPAMP1:RN1.2
  Bottom 0.203: v38.08,60.15 38.08,60.96 41.12,64.01 41.12,64.82 43.56,67.26 58.6,67.26 J4.1
S6B  (via drill 0.38)
  Top 0.203: v16.13,30.28 17.35,31.5 17.35,33.12 OPAMP1:RN3.3 | v70.18,2.03 71.4,3.25 71.4,5.08 70.18,6.3 J5.1
  Bottom 0.203: v16.13,30.28 16.13,24.59 36.65,4.06 36.65,3.05 37.67,2.03 v70.18,2.03
S7
  Top 0.203: SV7.2 39.71,91.29 40,91 43.19,91 J10.3
S7A  (via drill 0.38)
  Top 0.203: v41.94,64.62 38.28,60.96 37.87,60.96 33.2,56.29 33.2,56.08 32.79,55.68 OPAMP2:RN1.2
  Bottom 0.203: v41.94,64.62 58.6,64.62 62.46,68.48 J4.3
S7B  (via drill 0.38)
  Top 0.203: v19.38,50.19 19.38,46.74 18.98,46.33 18.16,46.33 17.96,46.53 17.96,46.74 17.55,47.14 OPAMP2:RN3.3 | v35.84,3.86 36.45,3.86 37.87,2.44 56.77,2.44 59.41,5.08 66.32,5.08 67.54,6.3 J5.3
  Bottom 0.203: v19.38,50.19 17.55,50.19 13.29,45.92 13.29,7.92 16.13,5.08 34.62,5.08 v35.84,3.86
S8
  Top 0.203: SV7.3 39.75,88.75 40,88.5 J10.5
S8A  (via drill 0.38)
  Top 0.203: v56.57,56.9 56.57,55.68 OPAMP3:RN1.2
  Bottom 0.203: v56.57,56.9 56.57,60.15 57.99,61.57 57.99,62.79 62.46,67.26 63.68,67.26 J4.5
S8B  (via drill 0.38)
  Top 0.203: v38.08,49.58 38.08,48.77 38.48,48.36 40.51,48.36 40.92,47.95 40.92,47.75 41.33,47.35 OPAMP3:RN3.3
  Bottom 0.203: v38.08,49.58 47.83,49.58 50.88,46.53 68.96,46.53 72.01,43.48 72.01,33.93 70.79,32.72 70.79,20.93 76.48,15.24 77.7,15.24 78.31,14.63 78.31,13.41 72.62,7.72 66.32,7.72 65.1,6.5 J5.5
S9
  Top 0.203: SV7.4 37.71,86 43.19,86 J10.7
S9A
  Top 0.203: J4.7 67.54,67.46 60.02,59.94 60.02,46.74 56.77,43.48 56.77,41.66 OPAMP4:RN1.2
S9B
  Top 0.203: OPAMP4:RN3.3 41.53,33.12 41.53,17.07 50.88,7.72 61.24,7.72 62.46,6.5 J5.7
S10
  Top 0.203: SV7.5 39.83,83.67 40.08,83.42 J10.9
S10A
  Top 0.203: J4.9 79.53,59.13 79.53,55.68 OPAMP5:RN1.2
S10B  (via drill 0.38)
  Top 0.203: v63.07,9.55 63.07,14.63 59.01,18.69 59.01,38.81 64.29,44.09 64.29,47.14 OPAMP5:RN3.3
  Bottom 0.203: v63.07,9.55 60.02,6.5 J5.9
S11
  Top 0.203: J11.1 56.85,83.5 60,83.5 60.17,83.67 SV9.1
S11A  (via drill 0.38)
  Top 0.203: v29.34,59.13 29.34,51.41 28.73,50.8 26.29,50.8 26.09,50.6 26.09,48.36 31.17,43.28 31.17,41.66 OPAMP1:RN1.3
  Bottom 0.203: v29.34,59.13 31.17,59.13 33.61,61.57 33.61,63.8 38.28,68.48 J6.1
S11B  (via drill 0.38)
  Top 0.203: v16.13,31.29 16.13,33.12 OPAMP1:RN3.2
  Bottom 0.203: v16.13,31.29 18.16,29.26 18.16,23.16 37.06,4.27 37.06,3.25 37.87,2.44 46.41,2.44 47.22,3.25 47.22,5.08 J7.1
S12
  Top 0.203: J11.3 56.85,86.04 56.89,86 60,86 60.21,86.21 SV9.2
S12A
  Top 0.203: OPAMP2:RN1.3 31.37,55.68 31.37,59.33 33.61,61.57 33.61,62.79 38.08,67.26 39.5,67.26 40.72,68.48 J6.3
S12B  (via drill 0.38)
  Top 0.203: v15.93,45.92 15.93,47.14 OPAMP2:RN3.2 | v15.93,44.3 13.49,44.3 8.56,39.37 6.58,39.37 5.31,38.1 5.31,29.21 6.58,27.94 9.12,27.94 10.44,26.62 10.44,26.01 16.74,26.01 17.15,25.6 17.15,8.53 15.32,6.71 15.32,5.89 16.13,5.08 44.58,5.08 45.8,6.3 J7.3
  Bottom 0.203: v15.93,44.3 v15.93,45.92
S13
  Top 0.203: 56.85,88.58 J11.5 60,88.5 60.25,88.75 SV9.3
S13A
  Top 0.203: OPAMP3:RN1.3 55.35,55.68 54.94,56.08 54.94,56.29 50.27,60.96 48.44,60.96 47.83,61.57 47.83,64.21 43.56,68.48 J6.5
S13B  (via drill 0.38)
  Top 0.203: v37.67,46.94 38.28,46.33 39.3,46.33 40.11,47.14 OPAMP3:RN3.2
  Bottom 0.203: v37.67,46.94 27.51,46.94 26.7,47.75 21.62,47.75 18.57,44.7 18.57,23.57 31.98,10.16 35.79,10.16 38.23,7.72 42.14,7.72 43.36,6.5 J7.5
S14
  Top 0.203: J11.7 56.85,91.12 56.97,91 60,91 60.29,91.29 SV9.4
S14A
  Top 0.203: OPAMP4:RN1.3 55.35,41.45 54.53,40.64 53.93,40.64 53.52,41.05 53.52,42.27 57.58,46.33 58.4,46.33 58.8,46.74 58.8,54.25 58.4,54.66 57.58,54.66 57.38,54.86 57.38,57.1 52.91,61.57 52.91,62.79 48.44,67.26 47.22,67.26 46,68.48 J6.7
S14B
  Top 0.203: OPAMP4:RN3.2 40.31,33.12 40.31,17.07 42.75,14.63 42.75,8.33 40.92,6.5 J7.7
S15
  Top 0.203: 61.92,93.58 SV9.5 60.33,93.83 60,93.5 56.85,93.5 J11.9
S15A  (via drill 0.38)
  Top 0.203: v60.83,58.73 75.26,58.73 78.31,55.68 OPAMP5:RN1.3 | v59.01,60.55 57.99,61.57 57.99,62.79 52.3,68.48 48.64,68.48 J6.9
  Bottom 0.203: v59.01,60.55 v60.83,58.73
S15B  (via drill 0.38)
  Top 0.203: v68.15,47.95 67.95,48.16 63.88,48.16 63.09,47.37 OPAMP5:RN3.2
  Bottom 0.203: v68.15,47.95 72.42,43.69 72.42,33.73 71.2,32.51 71.2,21.13 76.68,15.65 79.73,15.65 80.85,14.53 80.85,12.04 73.89,5.08 51.69,5.08 49.05,7.72 48.03,7.72 47.22,6.91 47.22,5.69 46.61,5.08 39.7,5.08 38.48,6.3 J7.9
S16
  Top 0.203: SV12.1 91.67,93.83 92,93.5 95.15,93.5 J12.1
S16A  (via drill 0.38)
  Top 0.203: v26.9,46.53 29.95,43.48 29.95,41.66 OPAMP1:RN1.4 | v28.53,56.49 23.45,61.57 23.45,62.79 18.98,67.26 17.96,67.26 16.74,68.48 J8.1
  Bottom 0.203: v26.9,46.53 37.06,46.53 37.47,46.13 37.87,46.13 38.48,46.74 38.48,48.16 30.15,56.49 v28.53,56.49
S16B  (via drill 0.38)
  Top 0.203: v14.91,30.28 14.91,33.12 OPAMP1:RN3.1
  Bottom 0.203: v14.91,30.28 14.91,18.49 26.9,6.5 J9.1
S17
  Top 0.203: SV12.2 91.71,91.29 92,91 95.19,91 J12.3
S17A
  Top 0.203: J8.3 21.01,66.85 24.46,66.85 28.53,62.79 28.53,61.57 30.15,59.94 30.15,55.68 OPAMP2:RN1.4
S17B  (via drill 0.38)
  Top 0.203: v14.91,45.92 14.91,47.14 OPAMP2:RN3.1
  Bottom 0.203: v14.91,45.92 14.91,31.29 14.1,30.48 14.1,16.66 24.26,6.5 J9.3
S18
  Top 0.203: SV12.3 91.75,88.75 92,88.5 J12.5
S18A
  Top 0.203: OPAMP3:RN1.4 54.13,55.68 48.64,55.68 42.75,61.57 42.75,67.46 42.14,68.07 42.14,71.73 41.33,72.54 32.79,72.54 27.51,67.26 23.04,67.26 21.82,68.48 J8.5
S18B  (via drill 0.38)
  Top 0.203: v37.67,47.95 38.28,47.35 38.89,47.35 OPAMP3:RN3.1
  Bottom 0.203: v37.67,47.95 27.1,47.95 26.9,48.16 16.13,48.16 13.69,45.72 13.69,14.63 21.82,6.5 J9.5
S19
  Top 0.203: SV12.4 89.71,86 95.19,86 J12.7
S19A  (via drill 0.38)
  Top 0.203: v59.21,56.49 59.21,46.53 58.6,45.92 58.4,45.92 54.74,42.27 54.74,42.06 54.33,41.66 OPAMP4:RN1.4
  Bottom 0.203: v59.21,56.49 59.82,56.49 71.4,68.07 71.4,71.73 70.59,72.54 32.79,72.54 27.51,67.26 25.68,67.26 J8.7
S19B
  Top 0.203: OPAMP4:RN3.1 38.89,33.12 38.89,26.01 19.38,6.5 J9.7
S20
  Top 0.203: SV12.5 91.83,83.67 92.08,83.42 J12.9
S20A
  Top 0.203: OPAMP5:RN1.4 77.09,55.47 77.9,54.66 87.91,54.66 94.21,60.96 94.21,64.97 92.94,66.24 92.94,71.73 91.72,72.95 31.17,72.95 26.9,68.68 J8.9
S20B  (via drill 0.38)
  Top 0.203: v57.38,40.64 57.38,42.27 61.65,46.53 61.65,47.08 OPAMP5:RN3.1 61.65,47.14 | v38.08,29.87 38.08,27.84 16.74,6.5 J9.9
  Bottom 0.203: v38.08,29.87 41.73,29.87 43.56,31.7 43.56,32.92 44.38,33.73 44.88,33.73 45.6,33.02 47.22,33.02 48.49,34.29 48.49,39.37 51.03,41.91 52.3,41.91 53.57,40.64 v57.38,40.64
VCC
  pour Bottom: 0,78.5 0,99.5 48,99.5 48.26,78.5
VCC1
  pour Bottom: 52,78.5 52,99.5 100,99.5 100.26,78.5
VREF  (via drill 0.38)
  Top 0.203: U$1.1 U$1.2 75.78,36.19 76.43,36.83 76.43,41.91 73.89,44.45 | v66.27,44.45 73.89,44.45 | 73.89,44.45 73.89,45.72 72.62,46.99 72.62,50.8 71.35,52.07 | OPAMP5:U$1.3 73.86,52.07 71.35,52.07 | OPAMP5:U$1.5 68.83,52.07 71.35,52.07 | OPAMP3:U$1.3 51.03,52.04 51.03,52.07 48.49,52.07 | 48.49,52.07 45.95,52.07 45.34,52.68 OPAMP3:U$1.5 | OPAMP2:U$1.3 26.27,51.42 | 26.27,51.42 25.63,52.07 21.82,52.07 21.21,52.68 OPAMP2:U$1.5 | OPAMP4:U$1.3 51,38.1 48.49,38.1 | OPAMP4:U$1.5 45.34,38.71 45.95,38.1 48.49,38.1 | 26.27,51.42 26.25,51.42 25.63,50.8 v25.63,44.45 25.63,38.83 26.29,38.17 26.8,38.17 OPAMP1:U$1.3 | 48.49,52.07 49.76,50.8 v49.76,44.45 48.49,43.18 48.49,38.1 | OPAMP1:U$1.5 20.55,39.39 v20.55,41.91
  Bottom 0.203: v20.55,41.91 23.09,44.45 v25.63,44.45 v49.76,44.45 v66.27,44.45

## Text on the board
tPlace: 5 | 6 | 5 | 6 | 1 | 10 | 1 | 10 | - | - | + | + | - | - | DI | + | CI | - | + | + | + | ^ | -
bPlace: Designed By: David Austin, Matthew Duncan, Michael Dugas | Designed By: David Austin, Matthew Duncan, Michael Dugas | Designed by: David Austin, Matthew Duncan, Michael Dugas